# Altium PCB Snap21.PcbDoc
Units mil, origin at the board's own origin, x right, y up, seen from the top; angles counter-clockwise.
Board outline 4345 x 1525 mil, 4 copper layers (Top Layer, Internal Plane 1, Internal Plane 2, Bottom Layer), stack 30.634 mil thick; 51 components, 39 nets, 211 pads, 32 vias.
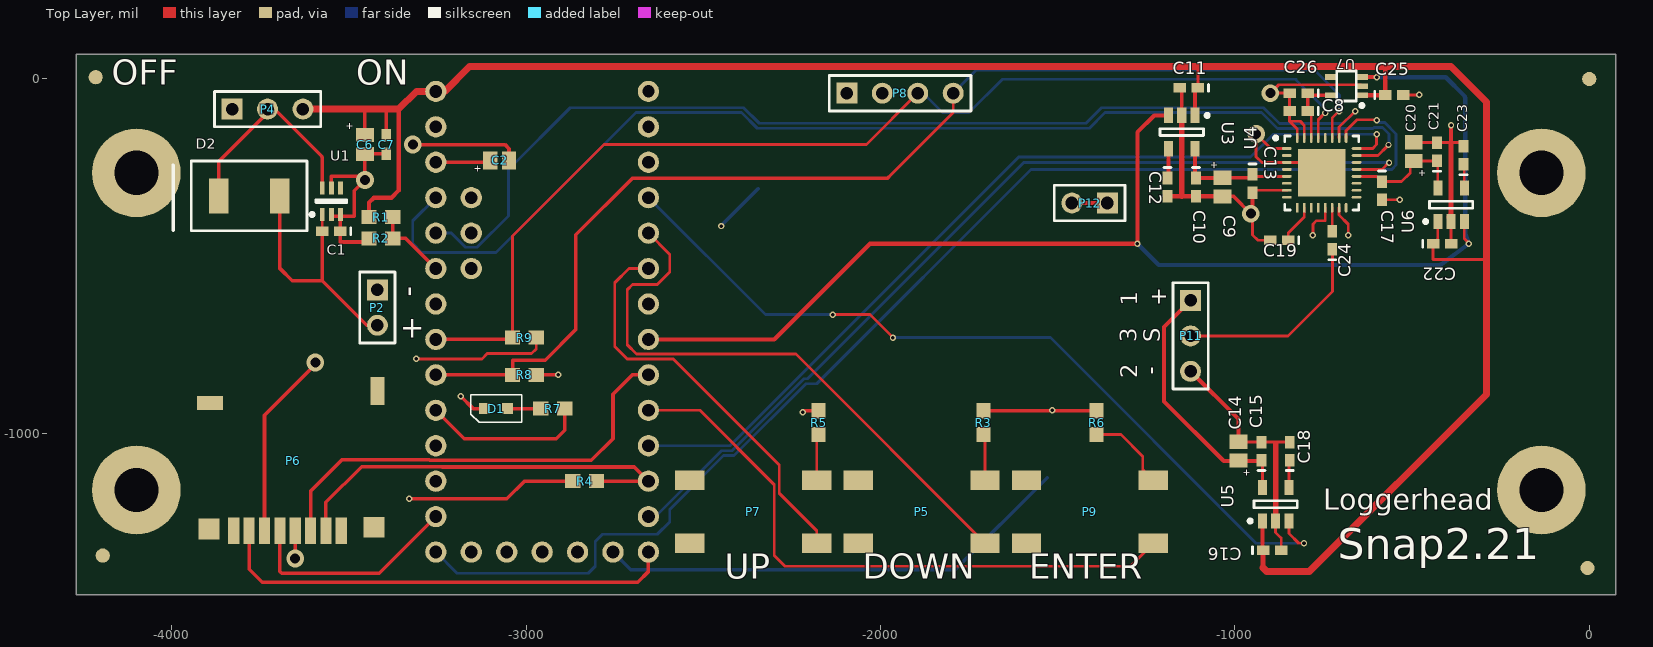
[diagram p0: Top Layer view]
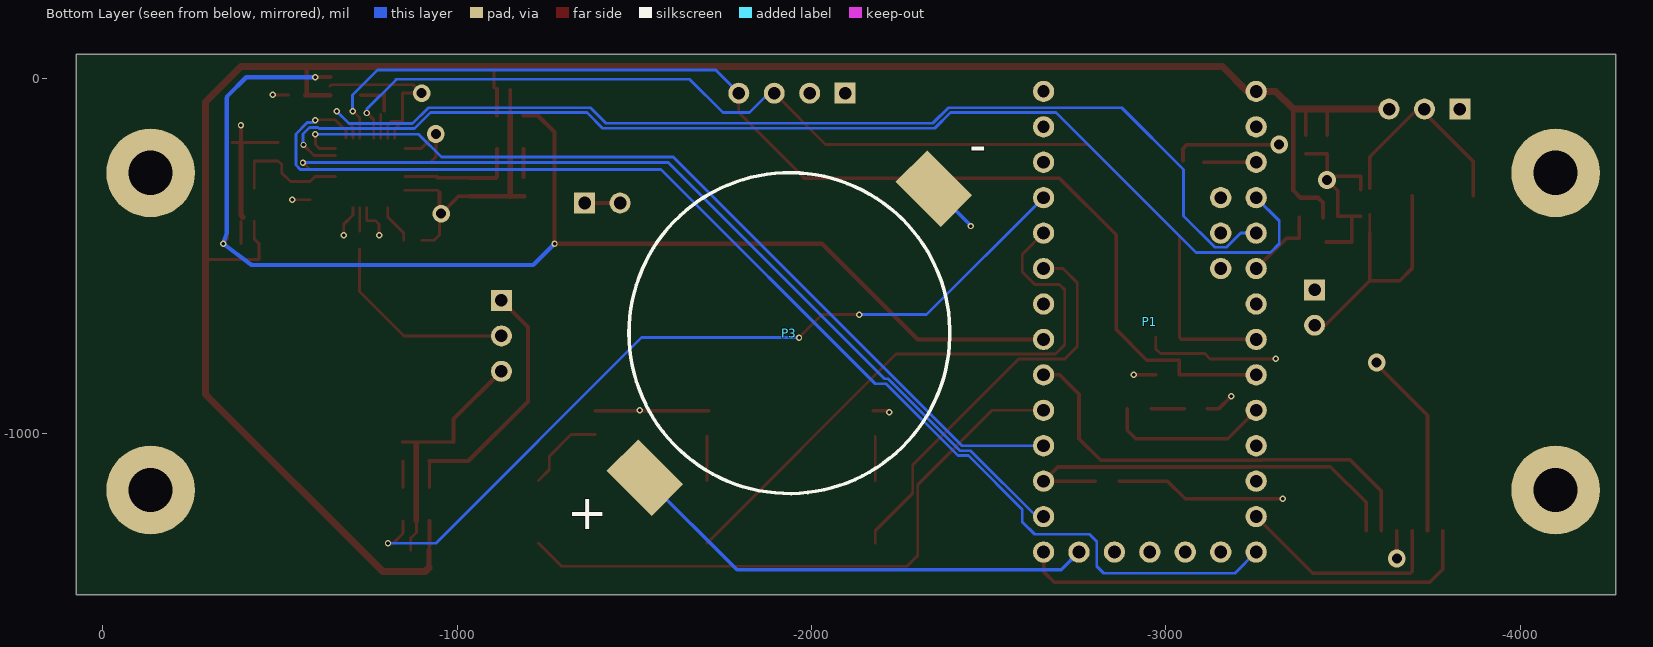
[diagram p1: Bottom Layer view, seen from below]
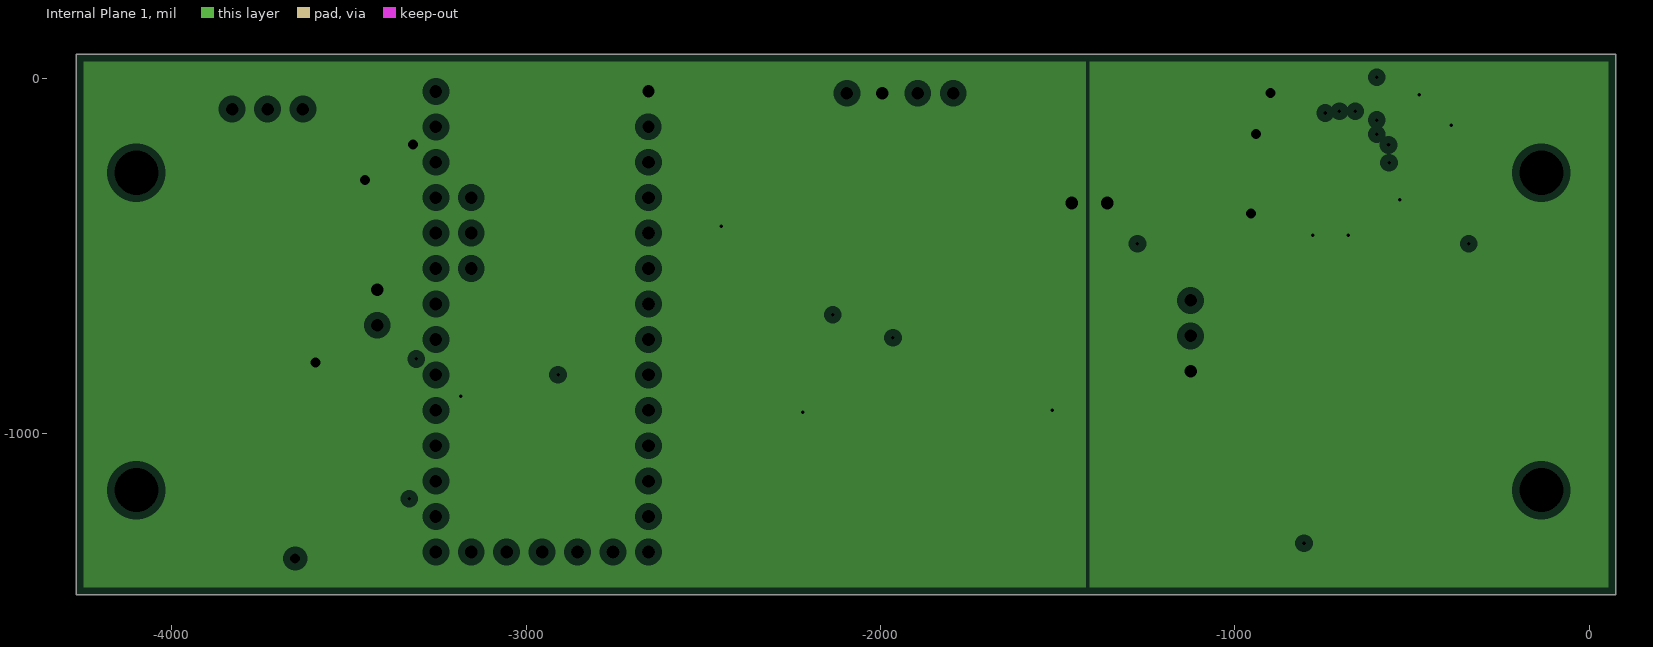
[diagram p2: Internal Plane 1, clearances drawn from the general rule]
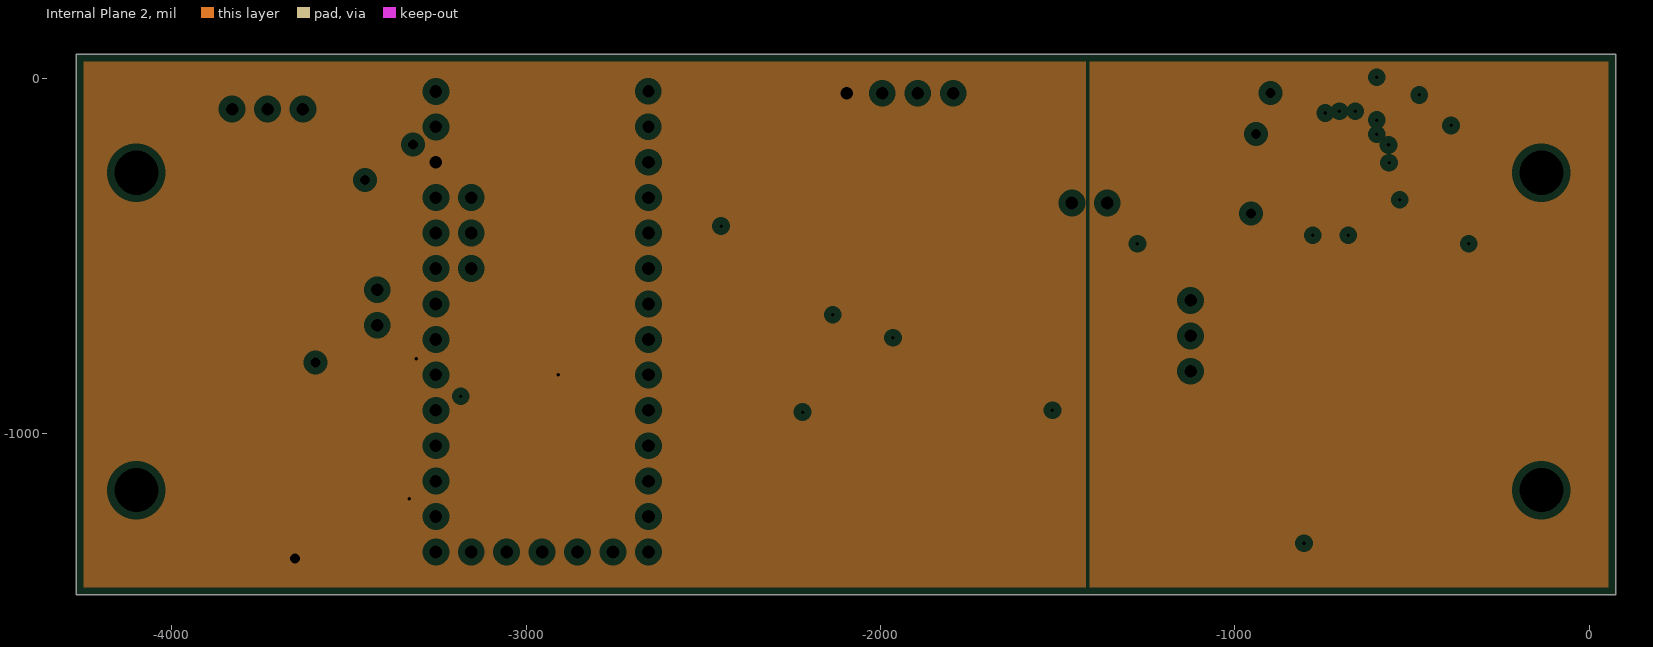
[diagram p3: Internal Plane 2, clearances drawn from the general rule]

## Layer stack, top to bottom
Top Solder: solder mask 0.4, Solder Resist, Dk 3.5
Top Layer: signal copper 1.4
Dielectric 1: core 10, FR-4, Dk 4.2
Internal Plane 1: plane copper 1.417, net (Multiple Nets)
Dielectric 3: prepreg 5, Dk 4.2
Internal Plane 2: plane copper 1.417, net VCC
Dielectric 2: core 10, Dk 4.2
Bottom Layer: signal copper 1.4
Bottom Solder: solder mask 0.4, Solder Resist, Dk 3.5

## Board outline
-4270,-1455 -4270,70 75,70 75,-1455

## Design rules (kind name [scope] priority, off if disabled: settings)
Clearance [All] p1: gap=6 ignorepadtopadclearanceinfootprint=FALSE except(0: Arc-Hole Track-Hole SMDPad-Hole THPad-Hole Via-Hole Fill-Hole Poly-Hole Region-Hole Text-Hole)
PlaneClearance [All] p1: clearance=20
PlaneConnect [All] p1: planeconnectstyle=Relief reliefexpansion=20 reliefentries=4 reliefconductorwidth=10 reliefairgap=10
PolygonConnect [All] p1: connectstyle=Relief reliefconductorwidth=10 reliefentries=4 polygonreliefangle="90 Angle" airgapwidth=10
RoutingVias [All] p1: holewidth=28 width=50 viastyle="Through Hole" minholewidth=10 minwidth=18 maxholewidth=28 maxwidth=50
SolderMaskExpansion [All] p1: expansion=4 istentingtop=FALSE
Width [All] p1: maxlimit=20 minlimit=6 preferedwidth=8
28 further rules are at their usual default settings.

## Classes and differential pairs
component class Snap21: C1 C2 C6 C7 D1 D2 P1 P2 P3 P4 P5 P6 P7 P8 P9 R1 R2 R3 R4 R5 R6 R7 R8 R9 U1
component class Snap21_audio: C8 C9 C10 C11 C12 C13 C14 C15 C16 C17 C18 C19 C20 C21 C22 C23 C24 C25 C26 P11 P12 U3 U4 U5 U6 U7

## Components (designator, comment, footprint, x,y, rotation, side; value= is the part's Value field where it differs from the comment)
C1 "1uF" 0402 -3550,-430 r180 top value=0.1uF
C2 "10uF" Tant0805 -3075,-230 r180 top
C6 "10uF" Tant0805 -3455,-185 r90 top
C7 "0.1uF" 0402 -3395,-185 r270 top
C8 "0.1uF" 0402 -820,-90 r180 top
C9 "10uF" Tant0805 -1035,-305 r90 top
C10 "0.1uF" 0402 -1110,-305 r270 top
C11 "1uF" 0402 -1130,-25 r180 top value=0.1uF
C12 "0.01uF" 0402 -1190,-305 r270 top value=0.1uF
C13 "0.1uF" 0402 -950,-295 r270 top
C14 "10uF" Tant0805 -990,-1050.16 r270 top
C15 "0.1uF" 0402 -925,-1050.16 r90 top
C16 "1uF" 0402 -895,-1330 r0 top value=0.1uF
C17 "0.1uF" 0402 -585,-315 r270 top
C18 "0.01uF" 0402 -845,-1050.16 r90 top value=0.1uF
C19 "0.1uF" 0402 -875,-455 r180 top
C20 "10uF" Tant0805 -495,-205 r270 top
C21 "0.1uF" 0402 -430,-205 r90 top
C22 "1uF" 0402 -415,-465 r0 top value=0.1uF
C23 "0.01uF" 0402 -355,-215 r90 top value=0.1uF
C24 "1.0uF" 0402 -725,-455 r90 top value=0.1uF
C25 "1.0uF" 0402 -550,-45 r0 top value=0.1uF
C26 "1.0uF" 0402 -820,-40 r180 top value=0.1uF
D1 "LED_0603" Diode0603 -3085,-930 r180 top
D2 "PMEG3050EP*" Diode_PMEG3050EP -3781.61,-330 r180 top
P1 "Teensy3.x" Teensy3.x -2655,-235 r0 bottom
P2 "Header 2" HDR1X2 -3420,-595 r270 top
P3 "CoinCellHolder" CoinCellHolder -1530,-1125 r135 bottom
P4 "switch EG1218" HDR1X3 -3830,-85 r0 top
P5 "pushbutton" SOP4 -1705,-1310 r180 top
P6 "microSD Hirose" "DM3D microSD" -3585,-1150 r90 top
P7 "pushbutton" SOP4 -2180,-1310 r180 top
P8 "Display" HDR1X4 -2095,-40 r0 top
P9 "pushbutton" SOP4 -1230,-1310 r180 top
P11 "HYDROPHONE" HDR1X3 -1125,-625 r270 top
P12 "GND Tie" HDR1X2 -1360,-350 r180 top
R1 "100k" 3-0603 -3410,-390 r180 top
R2 "100k" 3-0603 -3410,-450 r0 top
R3 "10k" 3-0603 -1710,-970 r90 top
R4 "10k" 3-0603 -2835,-1135 r0 top
R5 "10k" 3-0603 -2175,-970 r90 top
R6 "10k" 3-0603 -1390,-970 r90 top
R7 "330X" 3-0603 -2925,-930 r180 top
R8 "4.7k" 3-0603 -3005,-835 r0 top
R9 "4.7k" 3-0603 -3005,-730 r0 top
U1 "LM66100" SC-70-6 -3550,-345 r90 top
U3 "LP3985IM5-3.3" MF05A_N -1150,-150 r270 top
U4 "SGTL5000" QFN32 -755,-265 r0 top
U5 "LP3985IM5-3.3" MF05A_N -885,-1200.16 r90 top
U6 "LP3985IM5-3.3" MF05A_N -390,-355 r90 top
U7 "TLV70018DCKR" TI-DCK5_V -685,-20 r180 top

## Footprints (in the part's own frame and the unit in brackets; to place one, negate y for a bottom-side part, rotate by r counter-clockwise, add the part's x,y. Pads: shape width x height; smd on the part's side, far side on the other; paste and mask are expansions set on the pad)
3-0603 [mm] "Chip Resistor; Body 1.6 x 0.9 mm (LxW typ)"
  rect 1.1x1 smd: 1(-0.85,0) 2(0.85,0)
0402 [mm] "Chip Capacitor; Body 1.0 x 0.5 mm (LxW typ)"
  rect 0.9x0.7 smd: 1(-0.65,0) 2(0.65,0)
  silkscreen extent -1.4,-0.25 -1.4,0.25
CoinCellHolder [mm] "MPD BU2032SM-BT-GTR"
  rect 3.2x4.572 smd: 1(0,0) 2(29.3,0)
  silkscreen extent 3.15,-11.5 26.15,11.5
Diode0603 [mm]
  rect 0.8x0.8 smd: A(-0.825,0) K(0.825,0)
  silkscreen extent -1.83,-1 1.8,1
Diode_PMEG3050EP [mm]
  rect 1.4x2.5 smd: A(-2.2,0) K(2.2,0)
  silkscreen extent -4.15,-2.5 5.45,2.5
"DM3D microSD" [mm] "MICROSD_HIROSE Push-Pull"
  rect 1.5x1.5 smd: 0(-3.048,7.874) 0(-2.921,-3.937)
  rect 1x1.85 smd: 0(6,7.8)
  rect 2x1 smd: 0(6.85,-4.191)
  rect 1.9x0.8 smd: 1(-3.188,-1.601) 2(-3.188,-0.501) 3(-3.188,0.599) 4(-3.188,1.699) 5(-3.188,2.799) 6(-3.188,3.899) 7(-3.188,4.999) 8(-3.188,6.099)
  body extent -3.65,-4.45 7.8,7.5, height 1.55
HDR1X2 [mm] "Connector; Header; 2 Position"
  rect 1.5x1.5 hole 0.9: 1(0,0)
  round 1.5 hole 0.9: 2(2.54,0)
  silkscreen extent -1.27,-1.27 3.81,1.27
HDR1X3 [mm] "Connector; Header; 3 Position"
  rect 1.5x1.5 hole 0.9: 1(0,0)
  round 1.5 hole 0.9: 2(2.54,0) 3(5.08,0)
  silkscreen extent -1.27,-1.27 6.35,1.27
HDR1X4 [mm] "Connector; Header; 4 Position"
  rect 1.5x1.5 hole 0.9: 1(0,0)
  round 1.5 hole 0.9: 2(2.54,0) 3(5.08,0) 4(7.62,0)
  silkscreen extent -1.27,-1.27 8.89,1.27
MF05A_N [mm] "SOT23, 5-Leads, Body 2.9x1.6mm, Pitch 0.95mm, Lead Span 2.8mm, IPC Medium Density"
  rect 1.1x0.65 smd: 1(-1.2,0.95) 2(-1.2,0) 3(-1.2,-0.95) 4(1.2,-0.95) 5(1.2,0.95)
  silkscreen extent -1.32,-1.55 0.25,1.95, body extent -0.9,-1.55 0.9,1.55, height 1.19
QFN32 [mm]
  oval 0.7x0.2 smd: 1(-2.5,1.75) 2(-2.5,1.25) 3(-2.5,0.75) 4(-2.5,0.25) 5(-2.5,-0.25) 6(-2.5,-0.75) 7(-2.5,-1.25) 8(-2.5,-1.75) 17(2.5,-1.75) 18(2.5,-1.25) 19(2.5,-0.75) 20(2.5,-0.25) 21(2.5,0.25) 22(2.5,0.75) 23(2.5,1.25) 24(2.5,1.75)
  oval 0.2x0.7 smd: 9(-1.75,-2.5) 10(-1.25,-2.5) 11(-0.75,-2.5) 12(-0.25,-2.5) 13(0.25,-2.5) 14(0.75,-2.5) 15(1.25,-2.5) 16(1.75,-2.5) 25(1.75,2.5) 26(1.25,2.5) 27(0.75,2.5) 28(0.25,2.5) 29(-0.25,2.5) 30(-0.75,2.5) 31(-1.25,2.5) 32(-1.75,2.5)
  rect 3.4x3.4 smd paste-1.2: 33(0,0)
  silkscreen extent -3.42,-2.65 2.65,2.65, body extent -2.5,-2.5 2.5,2.5, height 1
SC-70-6 [mm] "SOT23, 6-Leads, Body 2.00x2.10mm, Pitch 0.65mm, IPC Medium Density"
  rect 0.9x0.35 smd: 1(-0.95,0.65) 2(-0.95,0) 3(-0.95,-0.65) 4(0.95,-0.65) 5(0.95,0) 6(0.95,0.65)
  silkscreen extent -1.07,-1.1 0.1,1.5, body extent -0.7,-1.07 0.7,1.08, height 1.1
SOP4 [mm]
  rect 2.1x1.4 smd: 1(0,0) 2(0,-4.5) 3(9.1,-4.5) 4(9.1,0)
Tant0805 [mil]
  rect 40x50 smd: 1(-26.5,0) 2(26.5,0)
Teensy3.x [mil]
  round 60 hole 35: 0(0,-100) GND(0,-200)
  round 60 hole 36: 1(0,0) 2(0,100) 3(0,200) 3.3V2(-200,1100) 4(0,300) 5(0,400) 6(0,500) 7(0,600) 8(0,700) 9(0,800) 10(0,900) 11(0,1000) 12(0,1100) 13(-600,1100) 14(-600,1000) 15(-600,900) 16(-600,800) 17(-600,700) 18(-600,600) 19(-600,500) 20(-600,400) 21(-600,300) 22(-600,200) 23(-600,100) A10(-500,200) A11(-500,300) A14(-500,1100) AGND(-600,-100) AREF(-500,100) GND2(-300,1100) PGM(-400,1100) VBat(-100,1100) Vin(-600,-200)
  round 60 hole 36 paste+0: 3.3V(-600,0)
TI-DCK5_V [mm] "SOT23, 5-Leads, Body 2x1.25mm, Pitch 0.65mm"
  rect 0.9x0.4 smd: 1(-1.1,0.65) 2(-1.1,0) 3(-1.1,-0.65) 4(1.1,-0.65) 5(1.1,0.65)
  silkscreen extent -1.23,-1.07 0.7,1.52, body extent -0.63,-1 0.63,1, height 1.1

## Part data
C1 C7 C8 C10 C11 C12 C13 C15 C16 C17 C18 C19 C21 C22 C23 C24 C25 C26: library part C0402, "Ceramic Chip Capacitor - Standard", PackageDocument=Mar-2001, Code_IPC="1005 [0402]", Code_JEITA=0402, ComponentLink1Description="Manufacturer Link", ComponentLink1URL=http://www.kemet.com/, ComponentLink2Description=Datasheet, ComponentLink2URL=http://www.kemet.com/kemet/web/homepage/kechome.nsf/vapubfilesname/F3102TA.pdf/$file/F3102TA.pdf, DatasheetDocument=Mar-2001, LatestRevisionDate=19-Mar-2004, LatestRevisionNote="Silkscreen size reduced.", Note="Footprint corresponds to dimensions for bulk cassette packaging. This case size has tightened tolerances.", PackageReference=0402, Published=17-Jul-2002, Publisher="Altium Limited"
C2 C6 C9 C14 C20: library part Tant0805
D2: library part Diode_PMEG3050EP
P2: "Header, 2-Pin", LatestRevisionDate=17-Jul-2002, LatestRevisionNote="Re-released for DXP Platform.", Publisher="Altium Limited"
P3: Supplier Part Number 1=BU2032SM-BT-GCT-ND, Supplier 1=Digi-Key
P4 P11: library part "Header 3", "Header, 3-Pin", LatestRevisionDate=17-Jul-2002, LatestRevisionNote="Re-released for DXP Platform.", Publisher="Altium Limited"
P5 P7 P9: Supplier Part Number 1=450-1757-2-ND, Supplier 1=Digi-Key
P6: Supplier Part Number 1=HR1941DKR-ND, Supplier 1=Digi-Key
P8: library part "Header 4", "Header, 4-Pin", LatestRevisionDate=17-Jul-2002, LatestRevisionNote="Re-released for DXP Platform.", Publisher="Altium Limited"
P12: library part "Header 2", "Header, 2-Pin", LatestRevisionDate=17-Jul-2002, LatestRevisionNote="Re-released for DXP Platform.", Publisher="Altium Limited"
R1 R2 R3 R4 R5 R6 R7 R8 R9: library part ERJ3RK, "Precision Thick Film Chip Resistor, 10 Ohm to 1M Ohm Range, 1% and 0.5% Tolerance, 0603 Size, 0.063 W", PackageDocument=Mar-2003, Code_IPC="1608 [0603]", ComponentLink1Description="Manufacturer Link", ComponentLink1URL=http://www.panasonic.com/industrial/components/resistive_products.htm, ComponentLink2Description=Datasheet, ComponentLink2URL=http://www.panasonic.com/industrial/components/pdf/AOA0000CE2.pdf, LatestRevisionDate=19-Mar-2004, LatestRevisionNote="Silkscreen size reduced.", PackageReference=3-0603, Published=17-Dec-2003, Publisher="Altium Limited"
U3 U5 U6: "Micropower, 150mA Low-Noise Ultra Low-Dropout CMOS Voltage Regulator", DigiKeyPartNumber=LP3985IM5-3.3CT-ND, Manufacturer="National Semiconductor", PackageTopMarking=LDQB*XTT, PowerWise=N, ComponentLink1Description="LP3985 Datasheet", ComponentLink1URL=http://www.national.com/ds/LP/LP3985.pdf, ComponentLink2Description="LP3985 Web Page", ComponentLink2URL=http://www.national.com/pf/LP/LP3985.html, ComponentLink3Description="MF05A Package Page", ComponentLink3URL=http://www.national.com/packaging/folders/mf05a.html, CompType="LDO IC", DatasheetVersion=Aug-2005, PackageDescription="Molded SOT-23, .115 x .063 x .040 in Body, 5 Lead, .0375 in Pitch", PackageReference=MF05A, PackageVersion="revD, Aug-2008", PartNumber=LP3985IM5-3.3, PinCount=5, Published=4-Dec-2008, Publisher="Altium Limited", RoHS=O
U7: "Single Output LDO, 200 mA, Fixed 1.8 V Output, 2 to 5.5 V Input, with Low IQ, 5-pin SC70 (DCK), -40 to 125 degC, Green (RoHS & no Sb/Br)", Manufacturer="Texas Instruments", Supplier Part Number 1=296-32409-2-ND, Accuracy(%)=2, Code_JEDEC=MO-203, ComponentLink1Description="Manufacturer URL", ComponentLink1URL=http://www.ti.com/, ComponentLink2Description=Datasheet, ComponentLink2URL=http://www.ti.com/general/docs/lit/getliterature.tsp?genericPartNumber=TLV70018&fileType=pdf, ComponentLink3Description="Package Specification", ComponentLink3URL=http://www.ti.com/litv/pdf/mpds025f, DatasheetVersion=SLVSA00D, Eco-Plan="Green (RoHS & no Sb/Br)", Fixed Output Options(V)=1.8, Iout(Max)(A)=0.2, Iq(Typ)(mA)=0.03, Mounting Technology="Surface Mount", PackageDescription="5-Pin Plastic Small-Outline, Body 2 x 1.25 mm, Pitch 0.65 mm", PackageReference=DCK5, PackageVersion=4093553-3/G, PartNumber=TLV70018DCKR, SubFamily="Single Channel LDO", Supplier 1=Digi-Key, Supplier 2=Digi-Key, Supplier 3=Digi-Key, Supplier 4=Newark, Supplier 5=Mouser, Supplier Part Number 2=296-32409-1-ND, Supplier Part Number 3=296-32409-6-ND, Supplier Part Number 4=55R7461, Supplier Part Number 5=595-TLV70018DCKR, Vdo(Typ)(mV)=175, Vin(Max)(V)=5.5, Vin(Min)(V)=2, Vout Adj(Max)(V)=1.8, Vout Adj(Min)(V)=1.8

## Free pads (board coordinates)
  round 40 smd paste-20 mask+5: 0(-4215,5) 0(-4195,-1345) 0(-5,-1380) 0(0,0)
  round 250 hole 125: 0(-4100,-265) 1(-135,-265) 2(-135,-1160) 3(-4100,-1160)

## Via types
v1: diameter 18, hole 10, Top Layer to Bottom Layer, tented both sides, 24 vias
v2: diameter 50, hole 28, Top Layer to Bottom Layer, tented both sides, 6 vias
v3: diameter 50, hole 28, Top Layer to Bottom Layer, 1 vias
v4: diameter 18, hole 10, Top Layer to Bottom Layer, 1 vias

## Nets (pads, with @x,y where several pads share a name; then routed paths per layer and width w, separated by ;. In a path a pad name is that pad's centre, name@x,y a point inside that pad or via, vN(x,y) a via of type N, cw(c..) or ccw(c..) an arc to the next point about the centre after c; other vN are vias at no path point)
AGND: C8.2 C9.1 C10.2 C11.2 C12.2 C13.2 C14.1 C15.2 C16.2 C17.2 C18.2 C19.2 C20.1 C21.2 C22.2 C23.2 C25.2 C26.2 P11.3 P12.1 U3.2 U4.1 U4.3 U4.7 U4.13 U4.15 U4.31 U4.32 U4.33 U5.2 U6.2 U7.2 | length 3159.2
  Top Layer w8: C14.1 -989.09,-1024.57 C15.2 -890.43,-1024.57 ; v2(-955,-380) -950,-375 -950,-440 -935,-455 C19.2 ; C13.2@-945,-314.21 U4.7 ; U5.2 -885,-1280 -869.41,-1295.59 C16.2 ; -885,-1030 -890.43,-1024.57 ; U4.1 -898.9,-196.1 v2(-940,-155) -940,-219.41 -923.94,-235.47 U4.3 U4.33@-784.53,-235.47 ; C18.2 -890.43,-1024.57 ; U4.32 -823.9,-141.1 -845.59,-119.41 ; U4.31 -804.21,-130.79 -815.59,-119.41 -845.59,-119.41 ; v1@-780,-440 -780,-410 -769.84,-399.84 -745.16,-399.84 U4.13 ; U4.15 -705.79,-384.21 -680,-410 v1@-680,-445 ; U7.2 -645.47,-16.22 -876.22,-16.22 v2(-900,-40) C26.2 C8.2 -845.59,-119.41 ; C17.2 v1@-535.59,-340.59 ; C25.2 v1(-480,-45) ; C20.1 -494.09,-179.41 C21.2 -390,-179.41 C23.2@-365,-179.41 ; C22.2@-390,-464.41 U6.2
  Top Layer w10: U3.2 C11.2@-1150,-30.59 ; C9.1 -1003.5,-331.5 v2(-955,-380)
  Top Layer w12: C12.2 -1150,-330.59 C10.2 C9.1@-1035.91,-330.59 ; P11.3 -990,-960 C14.1 ; v2@-950,-375 C13.2 ; -390,-179.41 v1@-390,-130
  Top Layer w15: -1150,-330.59 U3.2 ; U5.2 -885,-1030 ; U6.2@-395,-390 -394.39,-389.39 ccw(c-405,-378.79) -390,-378.79 -390,-179.41
  other v1: -780,-441 -680,-441 -535,-341 -390,-131
BATT_BACK: P1.VBat P3.1 | length 1353.4
  Bottom Layer w10: P1.VBat -2705,-1385 -1790,-1385 P3.1
BCLK: P1.9 U4.24 | length 2505.3
  Top Layer w8: U4.24 -611.1,-196.1 -600,-185 v1@-600,-160
  Bottom Layer w8: P1.9 -2425,-1035 -1610,-220 -955.5,-220 -891.5,-156 v1(-600,-156)
CS1: P1.10 P6.2 R4.2 | length 1196.3
  Top Layer w10: P6.2 -3565.28,-1194.72 -3464.55,-1094 -3238.02,-1094 -3237.02,-1095 -2695,-1095 P1.10 R4.2
DGND: C1.1 C2.1 C6.1 C7.2 D1.K P1.GND P2.1 P3.2 P6.6 P8.2 P12.2 R2.1 R3.2 R5.2 R6.2 U1.2 U1.3 U1.5 | length 2021.3
  Top Layer w10: P6.6 -3738.5,-948.5 v2@-3597.5,-807.5 ; U1.2@-3550,-387.4 U1.3@-3524.41,-387.4 ; U1.5@-3550,-312.6 -3550,-275 -3465,-275 v3(-3455,-285) ; C6.1 v3(-3455,-285) ; C6.1@-3454.09,-210.59 C7.2 ; R2.1@-3453.46,-460 -3524.41,-460 U1.3@-3524.41,-387.4 ; v2(-3320,-185) -3060,-185 -3048.5,-196.5 C2.1 ; v1(-3185,-895) -3150,-930 D1.K ; v1@-2216.54,-936.54 R5.2 ; R3.2 R6.2 ; U1.3@-3524.41,-387.4 -3485,-387.4 -3485,-315 v3(-3455,-285)
  Bottom Layer w10: v1(-2450,-415) -2450,-413.64 P3.2
  other v1: -2220,-940 -1515,-935
  other v2: -3595,-800
DN-TX: P1.3 P5.1 | length 1672.5
  Top Layer w8: P1.3 -2595,-495 -2595,-545 -2630,-580 -2700,-580 -2715,-595 -2715,-750 -2689,-776 -2239,-776 P5.1
ENT-RST: P1.8 P9.1 | length 1751.3
  Top Layer w8: P1.8 -2510,-935 -2300,-1145 -2300,-1345 -2270,-1375 -1295,-1375 P9.1
HYDRO_EN: P1.2 U5.3 | length 2342.9
  Top Layer w8: v1(-2135,-665) -2030,-665 v1(-1965,-730) ; U5.3 -847.6,-1282.4 -820,-1310 v1(-805,-1310)
  Bottom Layer w8: P1.2 -2325,-665 v1(-2135,-665) ; v1(-1965,-730) -1520,-730 -940,-1310 v1(-805,-1310)
I2SDIN: P1.22 U4.26 | length 3016.7
  Top Layer w8: U4.26 -705.79,-135.79 v1@-660,-90
  Bottom Layer w8: P1.22 -3211.57,-435 -3171.57,-475 -3138.43,-475 -3049.8,-386.37 -3049.8,-255.3 -2875.5,-81 -2386.37,-81 -2342.37,-125 -1420,-125 -1376,-81 -919,-81 -874,-126 -695,-126 v1(-660,-91)
I2SDOUT: P1.13 U4.25 | length 3552
  Top Layer w8: U4.25 -686.1,-146.1 -655,-115 v1@-600,-115
  Bottom Layer w8: P1.13 -3195,-1395 -2825,-1395 -2805,-1375 -2805,-1305 -2785,-1285 -2630,-1285 -2595,-1250 -2595,-1215 -2443,-1063 -2413.4,-1063 -2210.4,-860 -2180,-860 -1575,-255 -557.13,-255 -545,-242.87 -545,-155.2 -577.2,-123 -593,-123 v1(-600,-116)
IN_L: C24.2 U4.14 | length 65.5
  Top Layer w8: C24.2@-725.47,-428.94 U4.14
LED1: P1.17 R7.1 | length 467.9
  Top Layer w10: P1.17 -3175,-1015 -2915,-1015 -2891.54,-991.54 R7.1
LRCLK: P1.23 U4.23 | length 3278.7
  Top Layer w8: U4.23 -595.79,-215.79 v1@-570,-190
  Bottom Layer w8: P1.23 -3320,-400 -3320,-465 -3295,-490 -3085,-490 -2690,-95 -2392.17,-95 -2348.17,-139 -1410.25,-139 -1366.25,-95 -925,-95 -880,-140 -610.87,-140 -607.87,-137 -583,-137 -565,-155 -565,-184.58 v1(-566.57,-186.16)
MCLK: P1.11 U4.21 | length 2603.7
  Top Layer w8: U4.21 -585.16,-255.16 v1@-565,-235
  Bottom Layer w8: P1.11 -2634.8,-1235 -2448.8,-1049 -2419.2,-1049 -2216.2,-846 -2206,-846 -1596,-236 v1(-565,-236)
MISO: P1.12 P6.7 | length 1317.2
  Top Layer w10: P6.7 -3781.81,-1383.19 -3745,-1420 -2685,-1420 -2655,-1390 P1.12
MOSI: P1.7 P6.3 | length 1275.7
  Top Layer w10: P6.3 -3608.58,-1163.58 -3520,-1075 -3272.98,-1075 -3271.98,-1076 -2816,-1076 -2755,-1015 -2755,-890 -2700,-835 P1.7
NetC12_1: C12.1 U3.4 | length 79.6
  Top Layer w10: C12.1@-1187.4,-276.81 U3.4
NetC18_1: C18.1 U5.4 | length 74.6
  Top Layer w8: U5.4 C18.1@-847.6,-1078.35
NetC19_1: C19.1 U4.10 | length 110.3
  Top Layer w8: C19.1 -849.41,-434.41 -804.21,-389.21 U4.10
NetC23_1: C23.1 U6.4 | length 64.8
  Top Layer w8: U6.4 C23.1@-352.6,-242.99
NetC24_1: C24.1 P11.2 | length 571.2
  Top Layer w8: P11.2 -850,-725 -725,-600 C24.1
NetD1_A: D1.A R7.2 | length 94.1
  Top Layer w10: D1.A R7.2
NetP5_2: P5.2 R3.1 | length 124.4
  Top Layer w8: P5.2 R3.1@-1705,-1008.46
NetP7_2: P7.2 R5.1 | length 124.4
  Top Layer w8: P7.2 R5.1@-2180,-1008.46
NetP9_2: P9.2 R6.1 | length 235.7
  Top Layer w8: R6.1 -1321.54,-1003.46 -1260,-1065 -1260,-1102.83 P9.2
POW: D2.K P4.2 U1.6 | length 599.7
  Top Layer w8: P4.2@-3730,-95 P4.2
  Top Layer w10: D2.K -3868.23,-233.23 P4.2@-3730,-95 ; P4.2 -3714.14,-85 cw(c-3714.14,-95) -3707.11,-87.89 -3578.5,-216.5 cw(c-3585.59,-223.55) -3575.59,-223.51 ; U1.6 -3575.59,-223.55
SCK: P1.14 P6.5 | length 622.9
  Top Layer w10: P6.5 -3695.2,-1389.8 -3690,-1395 -3415,-1395 P1.14
SCL: P1.19 P8.3 R9.1 U4.29 | length 3147
  Top Layer w8: R9.1 -3038.46,-443.46 -2780,-185 -2040,-185 P8.3 ; U4.29 -764.84,-114.84 v1@-745,-95
  Top Layer w10: P1.19 R9.1@-3043.46,-735
  Bottom Layer w8: P8.3 -1880,-40 -1825,-95 -1750,-95 -1655.9,-0.9 -827.5,-0.9 -827.5,-2.5 -745,-85 v1(-745,-96)
SDA: P1.18 P8.4 R8.1 U4.27 | length 3272.1
  Top Layer w8: -1977.5,-277.5 -1795,-95 P8.4 ; U4.27 -725.47,-110.47 v1@-710,-95
  Top Layer w10: P1.18 R8.1 -3038.46,-793.46 -2946.54,-793.46 -2860,-706.93 -2860,-440 -2700,-280 -1980,-280 -1977.5,-277.5
  Bottom Layer w8: P8.4 -1730,25 -775,25 -705,-45 v1(-705,-91)
SGTL_EN: P1.6 U3.3 U6.3 U7.3 | length 3691.5
  Top Layer w8: U6.3 -352.6,-449.7 -340,-462.29 v1(-340,-465)
  Top Layer w12: P1.6 -2300,-735 -2030,-465 v4(-1275,-465) -1275,-150 -1227.76,-102.76 U3.3 ; U7.3 v1@-600.59,5.59
  Bottom Layer w12: v4(-1275,-465) -1215,-525 -424.15,-525 ccw(c-424.15,-513) -416.8,-522.49 cw(c-409.45,-531.97) -416.62,-522.35 v1(-340,-465) -349.4,-436.53 cw(c-338,-432.78) -350,-432.83 -350.03,-54.94 ccw(c-362.03,-54.94) -353.47,-46.53 -353.51,-46.49 -405,5 v1(-600,5)
UP-RX: P1.4 P7.1 | length 1158.8
  Top Layer w8: P1.4 -2710,-535 -2750,-575 -2750,-755 -2715,-790 -2585,-790 -2286,-1089 -2286,-1169 -2180,-1275 P7.1
V_BATT: C1.2 D2.A P2.2 U1.1 | length 728.3
  Top Layer w8: C1.2 U1.1
  Top Layer w10: D2.A -3695,-535 -3660.59,-569.41 -3575.59,-569.41 ; C1.2@-3575.59,-435 -3575.59,-569.41 ; P2.2 -3450,-695 -3575.59,-569.41
VA: C9.2 C10.1 C13.1 U3.5 U4.5 | length 335.2
  Top Layer w8: C13.1@-944.57,-274.84 U4.5
  Top Layer w10: C10.1@-1112.6,-276.81 U3.5 ; C10.1 C9.2@-1035.91,-279.41 ; C9.2 C13.1@-944.57,-278.5
VCC: C2.2 P1.3.3V P6.4 P8.1 R4.1 R8.2 R9.2 | length 1151.7
  Top Layer w8: v1(-3310,-790) -3125,-790 -3110,-775 -2985,-775 -2971.54,-761.54 R9.2
  Top Layer w10: v2(-3651.89,-1353.11) P6.4 ; v1(-3330,-1185) -3055,-1185 -3005,-1135 R4.1 ; P1.3.3V C2.2@-3106.5,-235 ; R8.2 v1(-2910,-835)
VDDD: C8.1 C26.1 U4.30 U7.5 | length 177.2
  Top Layer w8: U4.30 C8.1@-784.53,-99.88
  Top Layer w10: C8.1 C26.1 ; C26.1@-788.82,-45.59 U7.5
VDDIO: C17.1 C20.2 C21.1 U4.20 U6.5 | length 348.2
  Top Layer w8: U4.20 -599.57,-274.84 C17.1 -529.41,-289.41 -505,-265 -505,-241.5 C20.2 -429.09,-231.5 -427.4,-233.19 U6.5
VH: C14.2 C15.1 P11.1 U5.5 | length 738
  Top Layer w8: U5.5 C15.1@-922.4,-1078.35
  Top Layer w12: P11.1 -1200,-700 -1200,-910 -1031.65,-1078.35 C15.1@-922.4,-1078.35
VIN: C6.2 C7.1 C11.1 C16.1 C22.1 C25.1 P1.Vin P4.3 R1.2 U3.1 U5.1 U6.1 U7.1 | length 6269.8
  Top Layer w8: C11.1 -1104.41,29.41 ; U6.1 -427.4,-451.81 C22.1 -440.59,-509.41 -295.59,-509.41 -290,-515
  Top Layer w10: C6.2 -3455,-90 ; -3450,-90 -3450,-85 ; C7.1 -3395,-85
  Top Layer w12: R1.2 -3443.46,-348.46 -3430,-335 -3380,-335 -3360,-315 -3360,-85 ; U3.1 C11.1@-1112.6,-28.19 ; C16.1@-922.4,-1317.17 U5.1 ; U7.1 C25.1@-571.18,-45.59 ; C25.1 -575.59,25.59
  Top Layer w15: -920.59,-1379.41 C16.1
  Top Layer w20: P4.3 -3450,-85 -3395,-85 -3360,-85 -3310,-35 P1.Vin -3230,-35 -3160,35 -390,35 -290,-65 -290,-515 -290,-890 -790,-1390 -910,-1390 -920.59,-1379.41
VSENS: P1.21 R1.1 R2.2 | length 216.7
  Top Layer w10: R1.1 R2.2 -3340,-450 P1.21
pads on no net: P1.0 P1.1 P1.3.3V2 P1.5 P1.15 P1.16 P1.20 P1.A10 P1.A11 P1.A14 P1.AGND P1.AREF P1.GND2 P1.PGM P4.1 P5.3 P5.4 P6.0 P6.1 P6.8 P7.3 P7.4 P9.3 P9.4 U1.4 U4.2 U4.4 U4.6 U4.8 U4.9 U4.11 U4.12 U4.16 U4.17 U4.18 U4.19 U4.22 U4.28 U7.4
copper on no net: | length 90
  Top Layer w12: -1460,-350 -1370,-350

## Polygon pours and split planes (outlines as drawn)
DGND on Internal Plane 1 (split plane): -1420.1,-1434.9 -4249.9,-1434.9 -4249.9,49.9 -1420.1,49.9
AGND on Internal Plane 1 (split plane): 54.9,-1434.9 -1409.9,-1434.9 -1409.9,49.9 54.9,49.9
VCC on Internal Plane 2 (split plane): -1420.1,-1434.9 -4249.9,-1434.9 -4249.9,49.9 -1420.1,49.9
VA on Internal Plane 2 (split plane): 54.9,-1434.9 -1409.9,-1434.9 -1409.9,49.9 54.9,49.9

## Other copper
Internal Plane 1 (plane layer: these items are gaps in the copper):
  lines w10: -1415,-1455 -1415,70
Internal Plane 2 (plane layer: these items are gaps in the copper):
  lines w10: -1415,-1455 -1415,70

## Silkscreen, mask and mechanical layers (free items; w line width, h text height)
Top Overlay:
  text "OFF" at -4170,-40 h120
  text "ON" at -3480,-40 h120
  text "-" at -3305,-615 h60 r90
  text "1" at -1260,-640 h80 r90
  text "+" at -1240,-650 h80
  text "+" at -3355,-730 h60
  text "3" at -1260.86,-742.46 h80 r90
  text "S" at -1195,-742.46 h80 r90
  text "-" at -1200,-835 h80 r90
  text "2" at -1260,-845 h80 r90
  text "Loggerhead" at -750,-1235 h100
  text "Snap2.21" at -710,-1385 h150
  text "UP" at -2440,-1435 h120
  text "DOWN" at -2050,-1435 h120
  text "ENTER" at -1580,-1435 h120
Bottom Overlay:
  text "-" at -2495,-235 h100
  text "+" at -1425,-1270 h100
Mechanical 1:
  the board outline again, w10

## Text inside footprints (layer, text, board x,y; h text height)
C2: Top Overlay "+" at -3125,-245 h19.68 r180
C6: Top Overlay "+" at -3490,-145 h19.68 r90
C9: Top Overlay "+" at -1050,-255 h19.68 r90
C14: Top Overlay "+" at -975,-1100.16 h19.68 r270
C20: Top Overlay "+" at -480,-255 h19.68 r270